# Altium PCB Inverter.PcbDoc
Units mm, origin at the board's own origin, x right, y up, seen from the top; angles counter-clockwise.
Board outline 99 x 99 mm, 2 copper layers (Top Layer, Bottom Layer); 78 components, 37 nets, 199 pads, 570 vias.
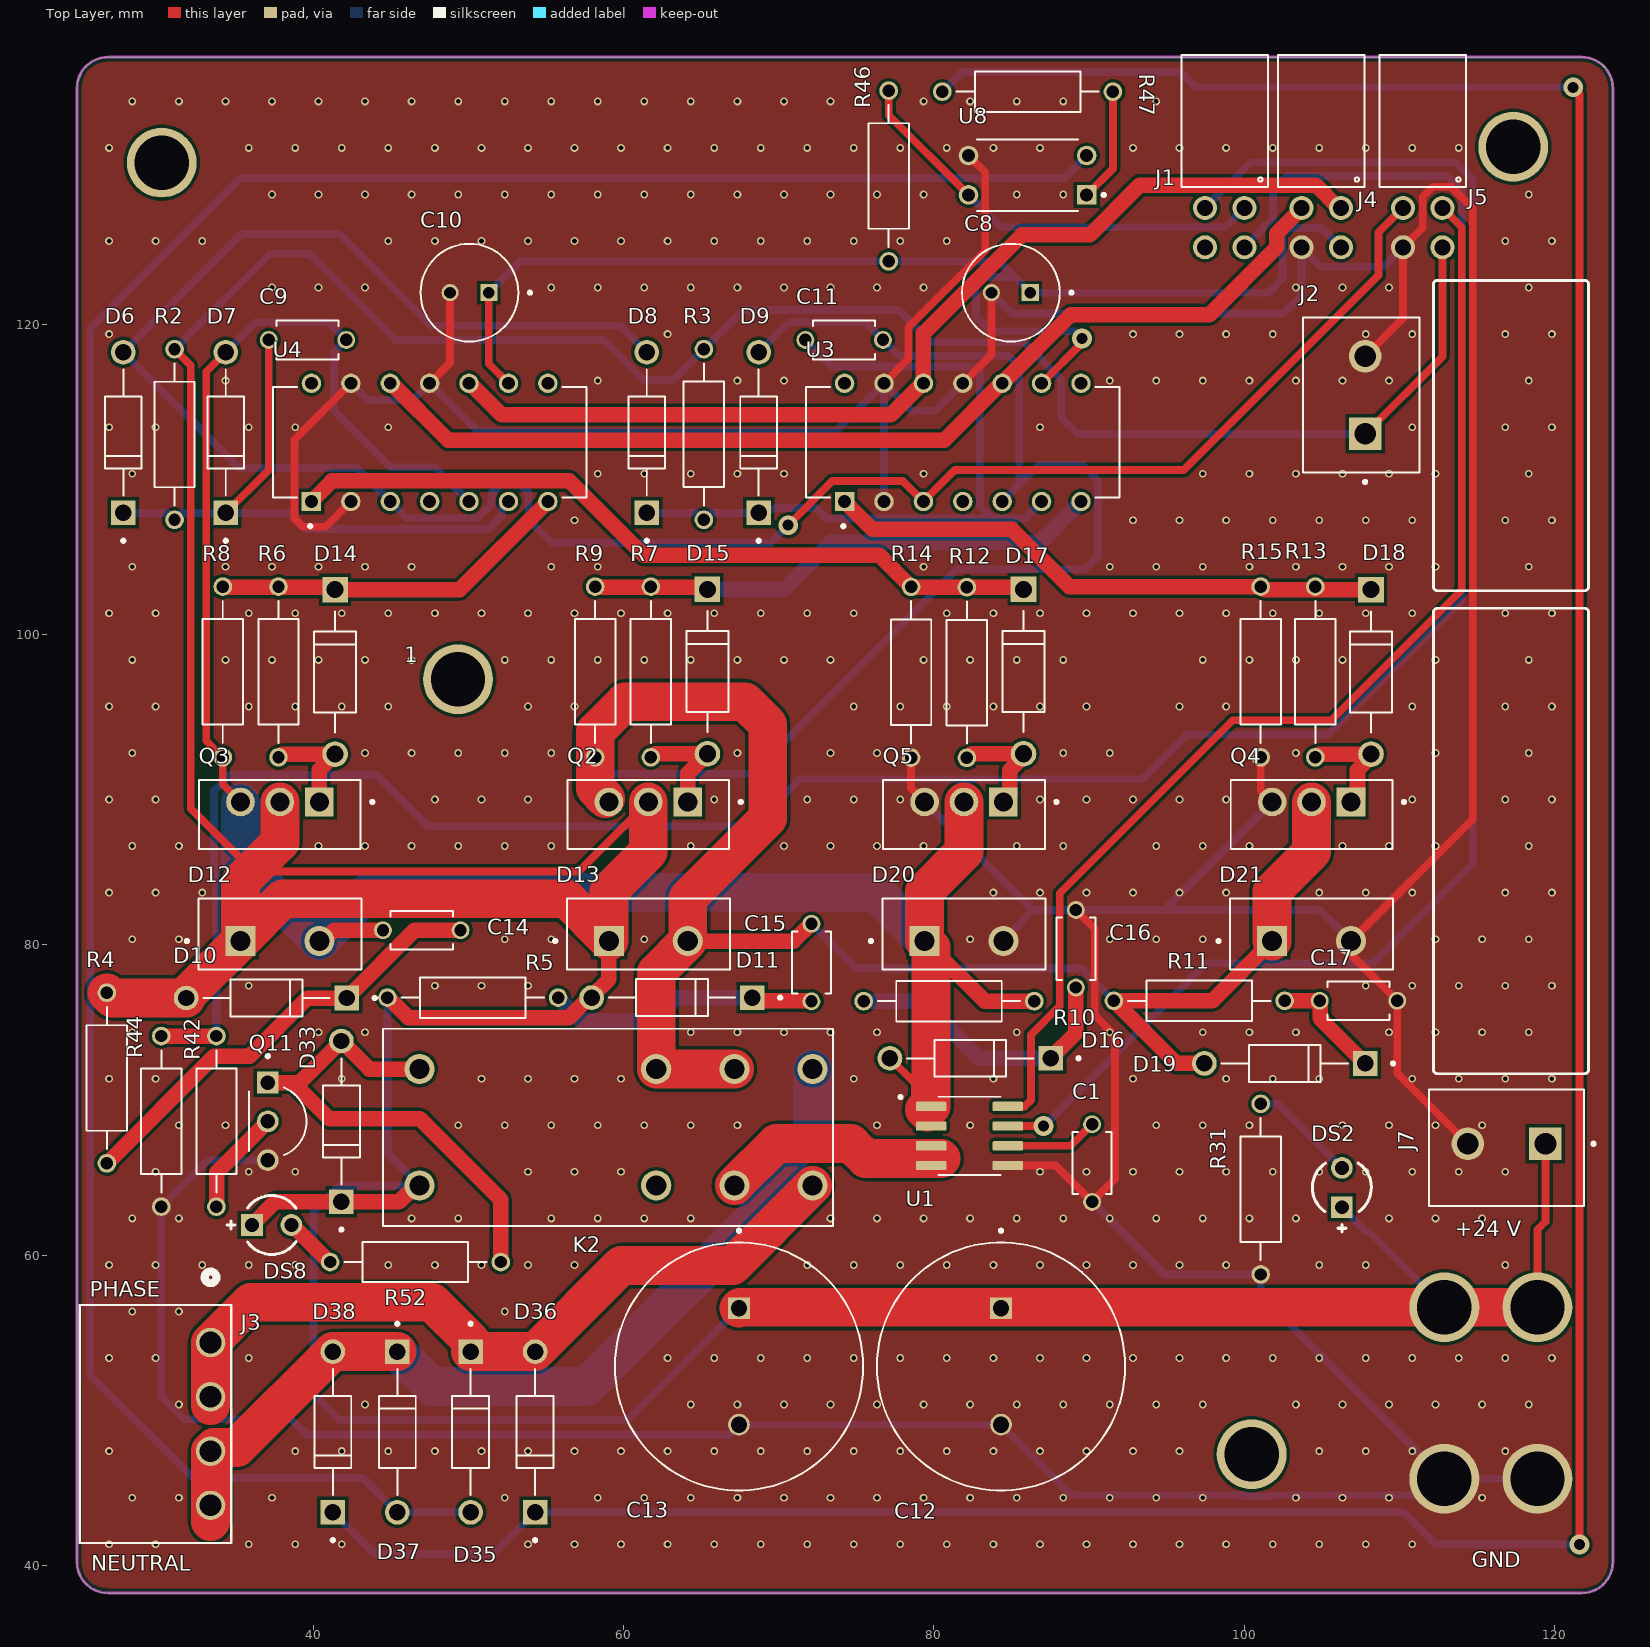
[diagram p0: Top Layer view]
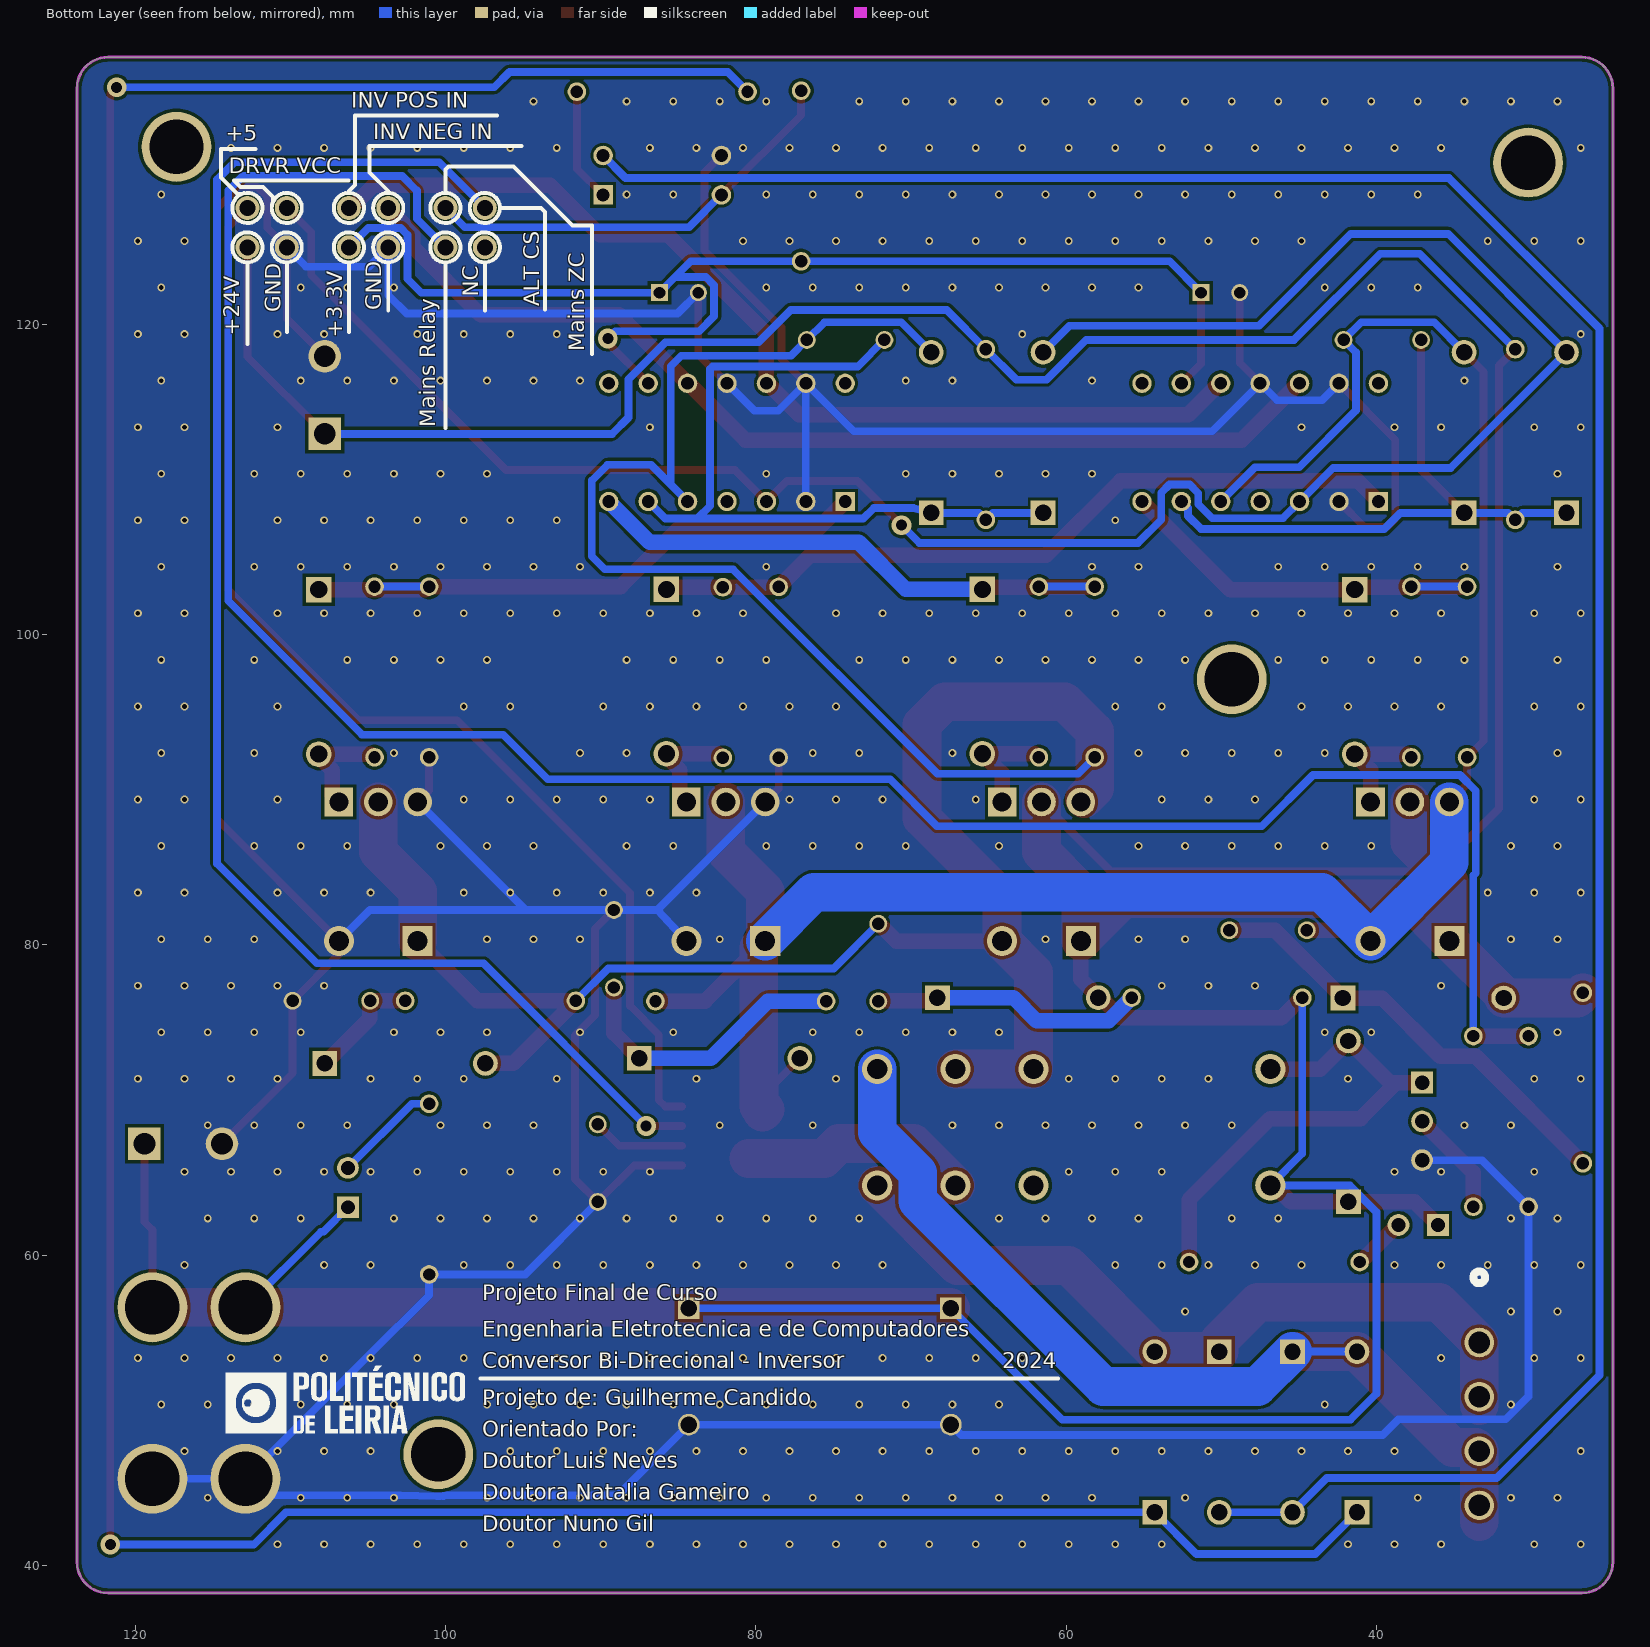
[diagram p1: Bottom Layer view, seen from below]
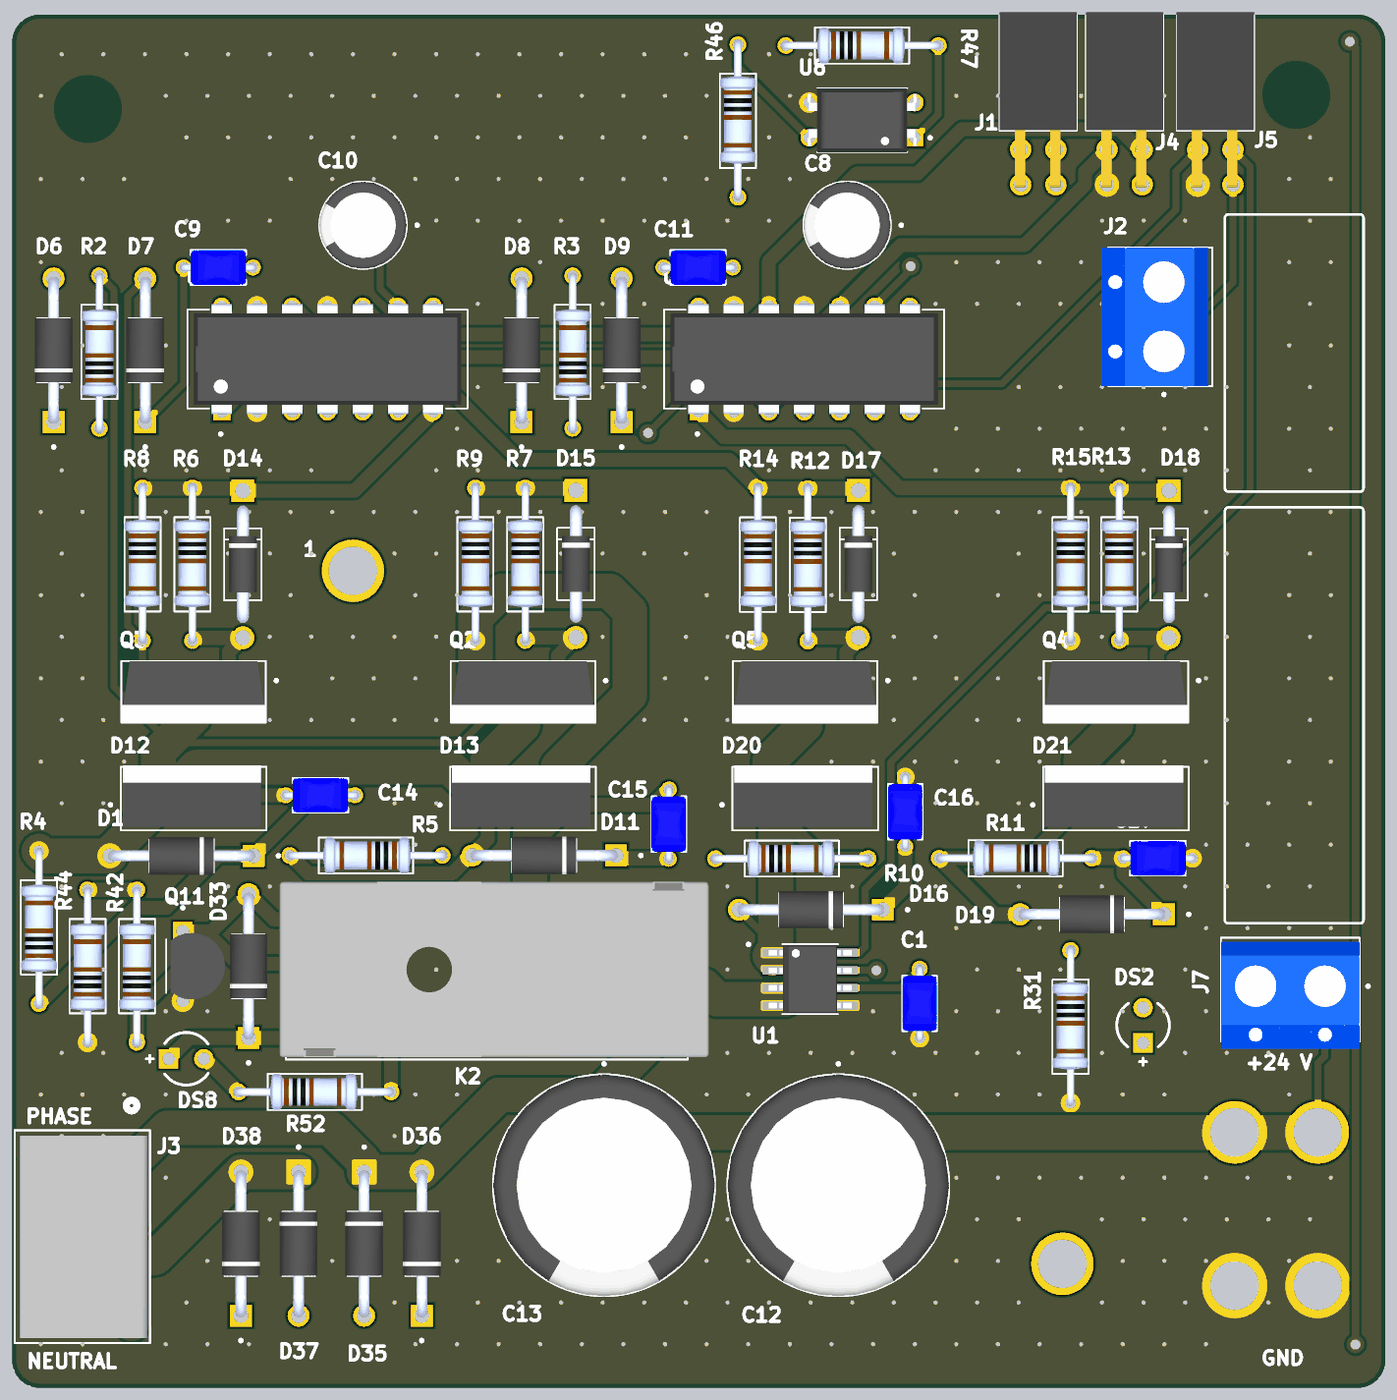
[diagram p2: 3D render of the assembled board from above, using the file's embedded part models]

## Layer stack, top to bottom
Top Solder: solder mask 0.0102, Solder Resist, Dk 3.5
Top Layer: signal copper 0.0356
Dielectric 1: dielectric 0.32, FR-4, Dk 4.8
Bottom Layer: signal copper 0.0356
Bottom Solder: solder mask 0.0102, Solder Resist, Dk 3.5

## Board outline
24.765,40.227 24.765,135.227 cw(c26.765,135.227) 26.765,137.227 121.765,137.227 cw(c121.765,135.227) 123.765,135.227 123.765,40.227 cw(c121.765,40.227) 121.765,38.227 26.765,38.227 cw(c26.765,40.227)

## Design rules (kind name [scope] priority, off if disabled: settings)
Clearance [All] p1: gap=0.2 ignorepadtopadclearanceinfootprint=TRUE
HoleSize [All] p1: absolutevalues=TRUE maxlimit=6.3 minlimit=0.3 maxpercent=80.000 minpercent=20.000
HoleToHoleClearance [All] p1: gap=0.5 allowstackedmicrovias=TRUE
PolygonConnect DirectPour [InNetClass('DirectPour')] p1: connectstyle=Direct reliefconductorwidth=0.254 reliefentries=4 polygonreliefangle="90 Angle" airgapwidth=0.254
PolygonConnect [All] p2: connectstyle=Relief reliefconductorwidth=0.254 reliefentries=4 polygonreliefangle="90 Angle" airgapwidth=0.254
RoutingVias [All] p1: holewidth=0.711 width=1.27 viastyle="Through Hole" minholewidth=0.3 minwidth=0.5 maxholewidth=6.3 maxwidth=10
SilkToSilkClearance [All] p1: silktosilkclearance=0
SolderMaskExpansion [All] p1: expansion=0.102 istentingtop=FALSE
UnRoutedNet [All] p1: checkbadconnections=TRUE
Width [All] p1: maxlimit=5 minlimit=0.127 preferedwidth=0.5 minimp=50.000000 maximp=50.000000 favimp=50.000000
26 further rules are at their usual default settings.

## Classes and differential pairs
net class DirectPour: +24 GND NetC9_1 NetC11_1 NetD35_1 NetD37_1
component class Zero-Cross_Detection: D35 D36 D37 D38 R46 R47 U8
component class "Power Circuit": D33 DS8 K2 Q11 R42 R44 R52
component class IR2110: C8 C9 C10 C11 D6 D7 D8 D9 R2 R3 U3 U4
component class Inverter: C1 C12 C13 C14 C15 C16 C17 D10 D11 D12 D13 D14 D15 D16 D17 D18 D19 D20 D21 Q2 Q3 Q4 Q5 R4 R5 R6 R7 R8 R9 R10 R11 R12 R13 R14 R15 U1

## Components (designator, comment, footprint, x,y, rotation, side; value= is the part's Value field where it differs from the comment)
1 "M3 Mounting Hole" "M3 - Mounting Hole"#1 49.327,97.13 r90 top
C1 "1nF" "Ceramic Capacitor" 90.195,65.938 r90 top
C8 "10uF Cap" CAP_10uF 84.963,122.047 r180 top
C9 "0.1uF" "Ceramic Capacitor" 39.624,118.999 r180 top
C10 "10uF Cap" CAP_10uF 50.063,122.047 r180 top
C11 "0.1uF" "Ceramic Capacitor" 74.219,118.999 r180 top
C12 "10uF Cap" 2200uF_Cap 84.328,52.832 r270 top
C13 "10uF Cap" 2200uF_Cap 67.437,52.832 r270 top
C14 "Ceramic Capacitor" "Ceramic Capacitor" 46.99,80.95 r0 top
C15 "Ceramic Capacitor" "Ceramic Capacitor" 72.111,78.867 r270 top
C16 "Ceramic Capacitor" "Ceramic Capacitor" 89.154,79.756 r270 top
C17 "Ceramic Capacitor" "Ceramic Capacitor" 107.366,76.403 r180 top
D6 "Fast-Rect Diode" "Common Trhough Hole" 27.752,113.03 r90 top
D7 "1N4110" "Common Trhough Hole" 34.356,113.03 r90 top
D8 "Fast-Rect Diode" "Common Trhough Hole" 61.493,113.03 r90 top
D9 "1N4110" "Common Trhough Hole" 68.707,113.03 r90 top
D10 "Normal Diode" "Common Trhough Hole" 36.984,76.581 r180 top
D11 "Normal Diode" "Common Trhough Hole" 63.119,76.606 r180 top
D12 "MBR10100" MBR10100 37.846,80.708 r0 top
D13 "MBR10100" MBR10100 61.595,80.708 r0 top
D14 "1N4148" "1N4007 DIODE" 41.402,97.599 r270 top
D15 "1N4148" "1N4007 DIODE" 65.405,97.624 r270 top
D16 "Normal Diode" "Common Trhough Hole" 82.347,72.695 r180 top
D17 "1N4148" "1N4007 DIODE" 85.776,97.624 r270 top
D18 "1N4148" "1N4007 DIODE" 108.179,97.599 r270 top
D19 "Normal Diode" "Common Trhough Hole" 102.616,72.365 r180 top
D20 "MBR10100" MBR10100 81.94,80.708 r0 top
D21 "MBR10100" MBR10100 104.343,80.708 r0 top
D33 "Normal Diode" "Common Trhough Hole" 41.808,68.631 r90 top
D35 "Normal Diode" "Common Trhough Hole" 50.14,48.609 r270 top
D36 "Normal Diode" "Common Trhough Hole" 54.297,48.609 r90 top
D37 "Normal Diode" "Common Trhough Hole" 45.415,48.609 r270 top
D38 "Normal Diode" "Common Trhough Hole" 41.258,48.609 r90 top
DS2 "LTL-1CHE" LED3mm 106.299,64.364 r90 top
DS8 "LTL-1CHE" LED3mm 37.313,61.951 r0 top
J1 "2x4-POS 2.54mm Header" "2x4-POS 2.54mm Header" 98.746,126.238 r180 top locked
J2 "KF301-2P" KF301-2P 107.798,115.443 r90 top
J3 "4P - Right 3.5mm Industrial Connector" "4P - Right 3.5mm Industrial Connector" 33.376,54.376 r270 top
J4 "2x4-POS 2.54mm Header" "2x4-POS 2.54mm Header" 104.97,126.238 r180 top locked
J5 "2x4-POS 2.54mm Header" "2x4-POS 2.54mm Header" 111.51,126.238 r180 top locked
J7 "KF301-2P" KF301-2P 116.916,67.183 r180 top
K2 "relay 8pin" "Relay socket 8pin" 59.512,68.25 r0 top
Q2 "IRF530NPBF" IRF530N 61.595,88.407 r180 top
Q3 "IRF530NPBF" IRF530N 37.846,88.407 r180 top
Q4 "IRF530NPBF" IRF530N 104.343,88.407 r180 top
Q5 "IRF530NPBF" IRF530N 81.94,88.407 r180 top
Q11 "BC548" bc548 37.719,68.631 r270 top
R2 "Resistor" "Resistor_Through Hole" 31.054,112.903 r90 top
R3 "Resistor" "Resistor_Through Hole" 65.176,112.905 r90 top
R4 "Resistor" "Resistor_Through Hole" 26.695,71.425 r90 top
R5 "Resistor" "Resistor_Through Hole" 50.278,76.606 r180 top
R6 "15R" "Resistor_Through Hole" 37.757,97.599 r270 top
R7 "15R" "Resistor_Through Hole" 61.76,97.599 r270 top
R8 "10K" "Resistor_Through Hole" 34.163,97.599 r270 top
R9 "10K" "Resistor_Through Hole" 58.166,97.599 r270 top
R10 "Resistor" "Resistor_Through Hole" 80.975,76.378 r0 top
R11 "Resistor" "Resistor_Through Hole" 97.104,76.403 r180 top
R12 "15R" "Resistor_Through Hole" 82.128,97.561 r270 top
R13 "15R" "Resistor_Through Hole" 104.584,97.599 r270 top
R14 "10K" "Resistor_Through Hole" 78.531,97.58 r270 top
R15 "10K" "Resistor_Through Hole" 101.067,97.599 r270 top
R31 "Resistor_Through Hole" "Resistor_Through Hole" 101.067,64.262 r270 top
R42 "Resistor_Through Hole" "Resistor_Through Hole" 33.757,68.631 r90 top
R44 "Resistor_Through Hole" "Resistor_Through Hole" 30.201,68.631 r90 top
R46 "Resistor" "Resistor_Through Hole" 77.089,129.565 r270 top
R47 "Resistor" "Resistor_Through Hole" 86.041,135.001 r0 top
R52 "Resistor_Through Hole" "Resistor_Through Hole" 46.584,59.563 r0 top
U1 "ACS712" ACS712 82.296,67.691 r0 top
U3 "IR2110" IR2110 81.864,112.395 r90 top
U4 "IR2110" IR2110 47.498,112.395 r90 top
U8 "PC817" PC817 86.041,129.616 r180 top
? "M3 Mounting Hole" "M3 - Mounting Hole"#2 163.195,5.207 r0 top
? "M3 Mounting Hole" "M3 - Mounting Hole"#3 114.808,58.547 r0 top
? "M3 Mounting Hole" "M3 - Mounting Hole"#4 114.681,49.276 r0 top
? "M3 Mounting Hole" "M3 - Mounting Hole"#5 205.364,85.446 r0 top
? "M3 Mounting Hole" "M3 - Mounting Hole"#6 108.839,58.547 r0 top
? "M3 Mounting Hole" "M3 - Mounting Hole"#7 108.712,49.276 r0 top
? "M3 Mounting Hole" "M3 - Mounting Hole"#1 100.482,47.168 r0 top

## Footprints (in the part's own frame and the unit in brackets; to place one, negate y for a bottom-side part, rotate by r counter-clockwise, add the part's x,y. Pads: shape width x height; smd on the part's side, far side on the other; paste and mask are expansions set on the pad)
"1N4007 DIODE" [mm]
  round 1.65 hole 1.1: A(5.3,0)
  rect 1.65x1.65 / inner round 1.65 / far side rect 1.65x1.65 hole 1.1: C(-5.3,0)
  silkscreen extent -3.9,-1.35 3.9,1.35, body extent -4.24,-1 4.24,1, height 2
"2x4-POS 2.54mm Header" [mm]
  round 1.545 hole 1.03: 1(-1.27,-1.27) 2(-1.27,1.27) 3(1.27,-1.27) 4(1.27,1.27)
  silkscreen extent -2.79,-11.13 2.79,-2.63, body extent -2.79,-11.15 2.79,1.45, height 5.02
"4P - Right 3.5mm Industrial Connector" [mil]
  round 75 / inner round 60 / far side round 75 hole 55 paste-99999 mask+0: 1(0,0) 2(137.79,0) 3(275.59,0) 4(413.39,0)
  silkscreen extent -180,-332 509,52, body extent -80,-317 494,45, height 274
2200uF_Cap [mm]
  round 1.4 hole 1.05: N(3.75,0)
  rect 1.4x1.4 hole 1.05: P(-3.75,0)
  silkscreen extent -8.85,-8 8,8, body extent -8,-8 8,8, height 31.5
ACS712 [mm]
  rrect25% 1.97x0.6 smd: 1(-2.475,1.905) 2(-2.475,0.635) 3(-2.475,-0.635) 4(-2.475,-1.905) 5(2.475,-1.905) 6(2.475,-0.635) 7(2.475,0.635) 8(2.475,1.905)
  silkscreen extent -4.54,-2.53 2,2.6, body extent -3,-2.45 3,2.45, height 1.75
bc548 [mm]
  rect 1.4x1.4 hole 0.93: 1(-2.5,-0.655)
  round 1.4 hole 0.93: 2(0,-0.655) 3(2.5,-0.655)
  silkscreen extent -4.3,-1.85 2.18,1.85, body extent -2.4,-1.53 2.4,2.4, height 7.74
CAP_10uF [mm]
  round 1.1 hole 0.75: N(1.25,0)
  rect 1.1x1.1 hole 0.75: P(-1.25,0)
  silkscreen extent -4,-3.15 3.15,3.15, body extent -3.15,-3.15 3.15,3.15, height 11.2
"Ceramic Capacitor" [mm] "22pF"
  round 1.15 hole 0.8: 1(-2.5,0) 2(2.5,0)
  silkscreen extent -2,-1.25 2,1.25, body extent -2.75,-1.25 2.75,1.25, height 5.5
"Common Trhough Hole" [mm]
  rect 1.59x1.59 / inner round 1.59 / far side rect 1.59x1.59 hole 1.06: 1(-5.18,0)
  round 1.59 hole 1.06: 2(5.18,0)
  silkscreen extent -7.07,-1.19 4.07,1.19, body extent -5.29,-1.36 5.29,1.36, height 2.72
IR2110 [mm]
  rect 1.25x1.25 / inner round 1.25 / far side rect 1.25x1.25 hole 0.83: 1(-3.81,7.62)
  round 1.25 hole 0.83: 2(-3.81,5.08) 3(-3.81,2.54) 4(-3.81,0) 5(-3.81,-2.54) 6(-3.81,-5.08) 7(-3.81,-7.62) 8(3.81,-7.62) 9(3.81,-5.08) 10(3.81,-2.54) 11(3.81,0) 12(3.81,2.54) 13(3.81,5.08) 14(3.81,7.62)
  silkscreen extent -5.5,-10.1 3.56,10.1, body extent -3.96,-9.65 3.96,9.65, height 5.33
IRF530N [mm]
  rect 1.845x1.845 hole 1.23: 1(-2.54,-0.81)
  round 1.845 hole 1.23: 2(0,-0.81) 3(2.54,-0.81)
  silkscreen extent -6.06,-2.22 5.21,2.22, body extent -5.21,-2.22 5.21,2.22, height 19.3
KF301-2P [mm]
  rect 2.1x2.1 hole 1.4: 1(-2.5,0)
  round 2.1 hole 1.4: 2(2.5,0)
  silkscreen extent -5.7,-3.5 5,4, body extent -5,-3.2 5,4.5, height 10
LED3mm [mm] "THD, 2-Leads, Dia 3.8mm, Pitch 2.54mm"
  rect 1.4x1.4 hole 0.9: 1(-1.27,0)
  round 1.4 hole 0.9: 2(1.27,0)
  silkscreen extent -2.87,-1.9 1.58,1.9, body extent -1.9,-1.9 1.9,1.9, height 6.5
"M3 - Mounting Hole"#1 [mm]
  round 4.5 / inner round 1.524 / far side round 4.5 hole 3.5: 1(0,0)
"M3 - Mounting Hole"#2 [mm]
  round 4.5 / inner round 1.524 / far side round 4.5 hole 3.5: 1(-45.847,126.238)
"M3 - Mounting Hole"#3 [mm]
  round 4.5 / inner round 1.524 / far side round 4.5 hole 3.5: 1(4.095,-1.905)
"M3 - Mounting Hole"#4 [mm]
  round 4.5 / inner round 1.524 / far side round 4.5 hole 3.5: 1(4.222,-3.683)
"M3 - Mounting Hole"#5 [mm]
  round 4.5 / inner round 1.524 / far side round 4.5 hole 3.5: 1(-175.138,44.983)
"M3 - Mounting Hole"#6 [mm]
  round 4.5 / inner round 1.524 / far side round 4.5 hole 3.5: 1(4.064,-1.905)
"M3 - Mounting Hole"#7 [mm]
  round 4.5 / inner round 1.524 / far side round 4.5 hole 3.5: 1(4.191,-3.683)
MBR10100 [mm]
  rect 1.94x1.94 / inner round 1.94 / far side rect 1.94x1.94 hole 1.29: 1(-2.54,-0.453)
  round 1.94 hole 1.29: 3(2.54,-0.453)
  silkscreen extent -6.1,-2.29 5.25,2.29, body extent -5.11,-2.03 4.86,2.41, height 19.05
PC817 [mm]
  rect 1.26x1.26 / inner round 1.26 / far side rect 1.26x1.26 hole 0.84: 1(-3.81,1.27)
  round 1.26 hole 0.84: 2(-3.81,-1.27) 3(3.81,-1.27) 4(3.81,1.27)
  silkscreen extent -5.01,-2.3 3.25,2.3, body extent -3.94,-2.3 3.94,2.3, height 4.55
"Relay socket 8pin" [mm]
  round 1.95 hole 1.3: 11(7.63,-3.75) 12(2.59,-3.75) 14(12.67,-3.75) 21(7.63,3.75) 22(2.59,3.75) 24(12.67,3.75) A1(-12.67,-3.75) A2(-12.67,3.75)
  silkscreen extent -15.02,-6.35 13.98,6.35, body extent -15.48,-6.2 15.48,6.45, height 8.9
"Resistor_Through Hole" [mm]
  round 1.2 hole 0.8: 1(-5.5,0) 2(5.5,0)
  silkscreen extent -4.58,-1.3 4.58,1.3, body extent -5.84,-1.29 5.71,1.29, height 2.6

## Part data
C1 C9 C11: library part "Ceramic Capacitor", Package="0805 AVX", Availability="In Stock", Check_prices=https://www.snapeda.com/parts/LD051A121KAB2A/AVX/view-part/?ref=eda, MF=AVX, MP=LD051A121KAB2A, Price=None, Purchase-URL=https://pricing.snapeda.com/search/part/LD051A121KAB2A/?ref=eda, SnapEDA_Link=https://www.snapeda.com/parts/LD051A121KAB2A/AVX/view-part/?ref=snap
C8 C10 C12 C13: "CAP ALUM 10UF 20% 50V RADIAL", Package="RADIAL-2 Panasonic", Availability="In Stock", Check_prices=https://www.snapeda.com/parts/ECE-A1HN100UI/Panasonic/view-part/2321690/?ref=eda, MF=Panasonic, MP=ECE-A1HN100UI, Price=None, SnapEDA_Link=https://www.snapeda.com/parts/ECE-A1HN100UI/Panasonic/view-part/2321690/?ref=snap
C14 C15 C16 C17: Package="0805 AVX", Availability="In Stock", Check_prices=https://www.snapeda.com/parts/LD051A121KAB2A/AVX/view-part/?ref=eda, MF=AVX, MP=LD051A121KAB2A, Price=None, Purchase-URL=https://pricing.snapeda.com/search/part/LD051A121KAB2A/?ref=eda, SnapEDA_Link=https://www.snapeda.com/parts/LD051A121KAB2A/AVX/view-part/?ref=snap
D6 D8: library part "Normal Diode", Package="DO-41 NTE Electronics", Availability="In Stock", Check_prices=https://www.snapeda.com/parts/1N4007/NTE+Electronics/view-part/?ref=eda, MF="NTE Electronics, Inc.", MP=1N4007, Price=None, Purchase-URL=https://pricing.snapeda.com/search/part/1N4007/?ref=eda, SnapEDA_Link=https://www.snapeda.com/parts/1N4007/NTE+Electronics/view-part/?ref=snap
D7 D9: library part "Zener Diode", Package="SMA-2 Taiwan Semiconductor", Availability="In Stock", Check_prices=https://www.snapeda.com/parts/1SMA5926/Taiwan+Semiconductor/view-part/?ref=eda, MF="Taiwan Semiconductor", MP=1SMA5926, Price=None, Purchase-URL=https://pricing.snapeda.com/search/part/1SMA5926/?ref=eda, SnapEDA_Link=https://www.snapeda.com/parts/1SMA5926/Taiwan+Semiconductor/view-part/?ref=snap
D10 D11 D16 D19 D33 D35 D36 D37 D38: Package="DO-41 NTE Electronics", Availability="In Stock", Check_prices=https://www.snapeda.com/parts/1N4007/NTE+Electronics/view-part/?ref=eda, MF="NTE Electronics, Inc.", MP=1N4007, Price=None, Purchase-URL=https://pricing.snapeda.com/search/part/1N4007/?ref=eda, SnapEDA_Link=https://www.snapeda.com/parts/1N4007/NTE+Electronics/view-part/?ref=snap
D12 D13 D20 D21: Package="DO-41 Diodes Inc.", Availability="In Stock", Check_prices=https://www.snapeda.com/parts/1N5817-T/Diodes+Inc./view-part/?ref=eda, MF="Diodes Inc.", MP=1N5817-T, Price=None, Purchase-URL=https://pricing.snapeda.com/search/part/1N5817-T/?ref=eda, SnapEDA_Link=https://www.snapeda.com/parts/1N5817-T/Diodes+Inc./view-part/?ref=snap
D14 D15 D17 D18: library part 1N4007, "Diode Standard 1000 V 1A Through Hole DO-41", Package="DO-41 NTE Electronics", Availability="In Stock", Check_prices=https://www.snapeda.com/parts/1N4007/NTE+Electronics/view-part/?ref=eda, MF="NTE Electronics, Inc.", MP=1N4007, Price=None, Purchase-URL=https://pricing.snapeda.com/search/part/1N4007/?ref=eda, SnapEDA_Link=https://www.snapeda.com/parts/1N4007/NTE+Electronics/view-part/?ref=snap
DS2 DS8: library part "RED_LED 3mm", "Radial LED, 12.6 mcd, 20 mA, 2 V, -55 to 100 degC, 2-Pin THD, RoHS, Bulk", Case\Package=Radial, Current Rating="3.6 A", Max Operating Temperature="130 degC", Min Operating Temperature="-40 degC", Package Quantity=55, Resistance="0.045 Ohm", Tolerance=20%, ComponentLink1Description="Manufacturer URL", ComponentLink1URL=http://www.us.liteon.com/, ComponentLink2Description=Datasheet, ComponentLink2URL=https://datasheet.ciiva.com/15117/getdatasheetpartid-187746-15117985.pdf, DatasheetVersion=Dec-03, Height="1.1 inch", Lead Pitch="11.44 mm", Length="0.97 inch", Mount="Through Hole", PackageDescription="2-Pin Through Hole Device, Dia 3.8 mm, Pitch 2.54 mm", PackageReference=LTL-1CHE, Packaging=Tray, Radiation Hardening=No, RoHSCompliant=true, Shielding=Unshielded, Width="0.62 inch"
J1 J4 J5: "Female header [WÃ¼rth Elektronik] 613004243121 Female header", Package=None, Availability=Unavailable, Check_prices=https://www.snapeda.com/parts/613004243121/W%C3%BCrth%20Elektronik/view-part/1737074/?ref=eda, MF="WÃ¼rth Elektronik", MP=613004243121, Price=None, SnapEDA_Link=https://www.snapeda.com/parts/613004243121/W%C3%BCrth%20Elektronik/view-part/1737074/?ref=snap
J2 J7: "2 Pin Terminal Block 5mm Pitch", Package=None, Availability=Unavailable, MP=KF301-2P, Price=None
J3: Package=None, Availability=Unavailable, MP=5-146290-4, Price=None
K2: "General Purpose Relay DPDT _2 Form C_ 24VDC Coil Through Hole", Package=None, Availability=Unavailable, MF="TE Connectivity", MP=1-1393243-0, Price=None, SnapEDA_Link=https://www.snapeda.com/parts/1-1393243-0/TE%20Connectivity%20Potter%20&%20Brumfield%20Relays/view-part/244556/?ref=snap
Q2 Q3 Q4 Q5: "RoHS Compliant", Package="TO-220 Infineon", Availability="In Stock", Check_prices=https://www.snapeda.com/parts/IRF530NPBF/Infineon+Technologies/view-part/?ref=eda, MF="Infineon Technologies", MP=IRF530NPBF, Price=None, Purchase-URL=https://pricing.snapeda.com/search/part/IRF530NPBF/?ref=eda, SnapEDA_Link=https://www.snapeda.com/parts/IRF530NPBF/Infineon+Technologies/view-part/?ref=snap
Q11: "Bipolar (BJT) Transistor NPN 30V 100mA 300MHz 500mW Through Hole TO-92-3", Package="TO-92 ON Semiconductor", Availability=Warning, DigiKey-Purchase-URL=https://snapeda.com/shop?store=DigiKey&id=2007035, MF="ON Semiconductor", MP=BC548, Price=None, SnapEDA_Link=https://www.snapeda.com/parts/BC548/ON%20Semiconductor/view-part/2007035/?ref=snap
R2 R3 R4 R5 R10 R11 R46 R47: Package=0805, Power_Rating=".25 W", Resistance=.33, Tolerance=1%, Availability="In Stock", Check_prices=https://www.snapeda.com/parts/2-2176053-0/TE+Connectivity/view-part/?ref=eda, EU_RoHS_Compliance="Compliant with Exemptions", MF="TE Connectivity", MP=2-2176053-0, Price=None, SnapEDA_Link=https://www.snapeda.com/parts/2-2176053-0/TE+Connectivity/view-part/?ref=snap
R6 R7 R12 R13: library part "Resistor_Through Hole", "1.02 Ohms Â±1% 0.25W, 1/4W Through Hole Resistor Axial Metal Film", Package="Axial Yageo", Availability=Warning, Check_prices=https://www.snapeda.com/parts/MFR-25FTE52-1R/Yageo/view-part/4629919/?ref=eda, MF=Yageo, MP=MFR-25FTE52-1R, Price=None, Purchase-URL=https://pricing.snapeda.com/search/part/MFR-25FTE52-1R/?ref=eda, SnapEDA_Link=https://www.snapeda.com/parts/MFR-25FTE52-1R/Yageo/view-part/4629919/?ref=snap
R8 R9 R14 R15: library part Resistor, Package=0805, Power_Rating=".25 W", Resistance=.33, Tolerance=1%, Availability="In Stock", Check_prices=https://www.snapeda.com/parts/2-2176053-0/TE+Connectivity/view-part/?ref=eda, EU_RoHS_Compliance="Compliant with Exemptions", MF="TE Connectivity", MP=2-2176053-0, Price=None, SnapEDA_Link=https://www.snapeda.com/parts/2-2176053-0/TE+Connectivity/view-part/?ref=snap
R31 R42 R44 R52: "1.02 Ohms Â±1% 0.25W, 1/4W Through Hole Resistor Axial Metal Film", Package="Axial Yageo", Availability=Warning, Check_prices=https://www.snapeda.com/parts/MFR-25FTE52-1R/Yageo/view-part/4629919/?ref=eda, MF=Yageo, MP=MFR-25FTE52-1R, Price=None, Purchase-URL=https://pricing.snapeda.com/search/part/MFR-25FTE52-1R/?ref=eda, SnapEDA_Link=https://www.snapeda.com/parts/MFR-25FTE52-1R/Yageo/view-part/4629919/?ref=snap
U1: "Current Sensor 5A 1 Channel Hall Effect, Open Loop Bidirectional 8-SOIC (0.154, 3.90mm Width)", Package="SOIC-8 Allegro MicroSystems LLC", Availability="In Stock", Check_prices=https://www.snapeda.com/parts/ACS712ELCTR-05B-T/Allegro+MicroSystems+LLC/view-part/?ref=eda, MF="Allegro MicroSystems LLC", MP=ACS712ELCTR-05B-T, Price=None, Purchase-URL=https://pricing.snapeda.com/search/part/ACS712ELCTR-05B-T/?ref=eda, SnapEDA_Link=https://www.snapeda.com/parts/ACS712ELCTR-05B-T/Allegro+MicroSystems+LLC/view-part/?ref=snap
U3 U4: "Half-Bridge Gate Driver IC Non-Inverting 16-SOIC", Package="SOIC-16 International Rectifier", Availability="In Stock", Check_prices=https://www.snapeda.com/parts/IR2110/Infineon+Technologies/view-part/?ref=eda, MF=Infineon, MP=IR2110, Price=None, Purchase-URL=https://pricing.snapeda.com/search/part/IR2110/?ref=eda, SnapEDA_Link=https://www.snapeda.com/parts/IR2110/Infineon+Technologies/view-part/?ref=snap
U8: "Optoisolator Transistor Output - 1 Channel 4-DIP", Package="DIP-4 Sharp Microelectronics", Availability="In Stock", Check_prices=https://www.snapeda.com/parts/PC817X3NSZ1B/Sharp+Microelectronics/view-part/?ref=eda, MF="Sharp Microelectronics", MP=PC817X3NSZ1B, Price=None, Purchase-URL=https://pricing.snapeda.com/search/part/PC817X3NSZ1B/?ref=eda, SnapEDA_Link=https://www.snapeda.com/parts/PC817X3NSZ1B/Sharp+Microelectronics/view-part/?ref=snap

## Via types
v1: diameter 0.5, hole 0.3, Top Layer to Bottom Layer, tented both sides, 565 vias
v2: diameter 1.27, hole 0.711, Top Layer to Bottom Layer, tented both sides, 5 vias

## Nets (pads, with @x,y where several pads share a name; then routed paths per layer and width w, separated by ;. In a path a pad name is that pad's centre, name@x,y a point inside that pad or via, vN(x,y) a via of type N, cw(c..) or ccw(c..) an arc to the next point about the centre after c; other vN are vias at no path point)
+3.3: C8.P C10.P J4.2 R46.2 U3.9 U4.9 | length 83
  Top Layer w0.5: C10.P 51.313,117.47 U4.9 ; U3.9 89.544,118.805 v2(89.544,119.09)
  Bottom Layer w0.5: C10.P 53.332,124.065 R46.2 84.195,124.065 85.197,123.063 ; v2(89.544,119.09) 89.074,119.561 83.665,119.561 82.702,120.523 82.702,122.53 83.236,123.063 85.197,123.063 ; J4.2 104.995,126.213 102.895,126.213 102.464,125.781 102.464,122.936 101.575,122.047 C8.P 85.197,123.063
+5: J5.1 U1.8 | length 74.9
  Top Layer w0.5: U1.8 85.852,69.596 86.258,70.002 86.258,74.219 88.113,76.073 88.113,83.337 99.263,94.488 105.613,94.488 114.021,102.895 114.021,126.267 J5.1
+24: ?.1@112.903,56.642 ?.1@118.903,56.642 C12.P C13.P D10.2 D11.2 D12.1 D13.1 D33.1 DS2.1 DS8.1 J2.1 J5.2 J7.1 K2.A1 Q2.2 Q3.2 R2.2 R3.2 R4.2 R5.2 | length 404.8
  Top Layer w0.5: R2.2 32.106,117.351 32.106,88.798 36.17,84.734 57.112,84.734 Q2.2 ; J2.1 112.78,117.925 J5.2 ; ?.1@118.903,56.642 118.903,61.646 119.416,62.159 J7.1
  Top Layer w1: DS8.1 37.543,63.451 D33.1 45.536,63.451 46.585,64.5 K2.A1 ; R5.2 44.833,76.606 46.133,75.306 56.479,75.306 57.779,76.606 D11.2 57.939,76.669 59.055,77.785 D13.1
  Top Layer w2.5: R4.2 27.039,76.581 D10.2 31.804,76.753 D12.1 ; Q3.2 37.846,86.613 35.306,84.073 D12.1 ; Q2.2 61.595,86.006 59.055,83.466 D13.1 56.335,82.975 38.026,82.975 D12.1 ; C13.P 67.497,56.642 112.903,56.642 ?.1@118.903,56.642
  Bottom Layer w0.5: R2.2 37.213,124.562 39.753,124.562 45.315,118.999 58.709,118.999 61.275,116.434 63.205,116.434 R3.2 67.701,120.929 77.749,120.929 79.832,118.847 85.827,118.847 88.214,116.459 88.214,113.995 89.266,112.943 J2.1 ; R5.2 44.778,66.564 K2.A1 41.716,64.5 40.005,62.789 40.005,51.079 41.681,49.403 60.258,49.403 C13.P C12.P ; DS2.1 107.874,61.519 108.026,61.519 ?.1@112.903,56.642
GND: ?.1@112.903,45.593 ?.1@118.903,45.593 C1.1 C8.N C10.N C12.N C13.N C16.1 C17.1 D20.3 D21.3 J2.2 J4.4 J5.4 J7.2 Q4.3 Q5.3 Q11.3 R14.2 R15.2 R31.2 R44.1 U1.5 U3.2 U3.11 U3.13 U4.2 U4.11 U4.13 U8.3 | length 432.5
  Top Layer w0.5: U4.2 40.792,106.959 39.319,106.959 38.786,107.493 38.786,112.573 U4.13 ; U4.11 48.813,117.52 C10.N ; U3.13 78.359,117.78 78.359,119.804 83.312,124.757 83.312,129.806 U8.3 ; R14.2 78.531,90.087 Q5.3 ; U3.11 83.713,118.054 C8.N ; U1.5 87.848,65.786 C1.1 91.669,64.912 91.669,74.168 90.373,75.463 90.373,81.037 C16.1 ; R15.2 101.067,89.954 Q4.3 ; J2.2 110.24,120.385 J5.4 111.506,126.234 111.506,128.219 112.166,128.88 113.335,128.88 114.732,127.483 114.732,88.104 D21.3 106.883,79.386 C17.1 109.866,71.733 J7.2
  Bottom Layer w0.5: Q11.3 33.201,66.131 R44.1 30.201,50.902 31.674,49.428 38.583,49.428 39.599,48.412 66.767,48.412 C13.N C12.N 88.737,44.673 88.884,44.526 99.924,44.526 ccw(c100.482,47.168) 100.557,44.469 102.922,44.526 111.836,44.526 ?.1@112.903,45.593 ; U4.13 43.51,115.113 46.406,115.113 U4.11 50.597,113.106 73.685,113.106 U3.13 ; U3.2 U3.13 ; Q5.3 86.361,82.256 ; U3.11 80.089,114.43 78.559,114.43 U3.13 ; C8.N 85.059,120.701 102.514,120.701 103.7,121.886 J4.4 104.945,123.723 108.995,123.723 J5.4 ; D20.3 86.361,82.256 ; C1.1 94.872,58.762 R31.2 101.067,57.429 104.978,53.518 110.978,47.518 ?.1@112.903,45.593 ; Q4.3 94.842,82.256 ; D21.3 104.882,82.256 94.842,82.256 ; ?.1@118.903,45.593 ?.1@112.903,45.593 ; 86.361,82.256 C16.1 94.842,82.256
  other v1: 26.836,41.376 29.836,41.376 35.836,41.376 38.836,41.376 41.836,41.376 53.836,41.376 56.836,41.376 59.836,41.376 62.836,41.376 65.836,41.376 68.836,41.376 71.836,41.376 74.836,41.376 77.836,41.376 80.836,41.376 83.836,41.376 86.836,41.376 89.836,41.376 92.836,41.376 95.836,41.376 98.836,41.376 101.836,41.376 104.836,41.376 107.836,41.376 110.836,41.376 28.336,44.376 31.336,44.376 37.336,44.376 52.336,44.376 58.336,44.376 61.336,44.376 64.336,44.376 67.336,44.376 70.336,44.376 73.336,44.376 76.336,44.376 79.336,44.376 82.336,44.376 85.336,44.376 88.336,44.376 91.336,44.376 94.336,44.376 97.336,44.376 103.336,44.376 106.336,44.376 109.336,44.376 115.336,44.376 26.836,47.376 38.836,47.376 41.836,47.376 44.836,47.376 47.836,47.376 50.836,47.376 53.836,47.376 56.836,47.376 59.836,47.376 62.836,47.376 65.836,47.376 68.836,47.376 71.836,47.376 74.836,47.376 77.836,47.376 80.836,47.376 83.836,47.376 86.836,47.376 89.836,47.376 92.836,47.376 95.836,47.376 104.836,47.376 107.836,47.376 110.836,47.376 116.836,47.376 31.336,50.376 43.336,50.376 64.336,50.376 67.336,50.376 70.336,50.376 73.336,50.376 76.336,50.376 79.336,50.376 82.336,50.376 85.336,50.376 88.336,50.376 91.336,50.376 94.336,50.376 97.336,50.376 103.336,50.376 106.336,50.376 109.336,50.376 112.336,50.376 115.336,50.376 118.336,50.376 26.836,53.376 29.836,53.376 35.836,53.376 62.836,53.376 65.836,53.376 68.836,53.376 71.836,53.376 74.836,53.376 77.836,53.376 80.836,53.376 83.836,53.376 86.836,53.376 89.836,53.376 92.836,53.376 95.836,53.376 98.836,53.376 101.836,53.376 104.836,53.376 107.836,53.376 110.836,53.376 113.836,53.376 116.836,53.376 119.836,53.376 28.336,56.376 31.336,56.376 52.336,56.376 26.836,59.376 29.836,59.376 32.836,59.376 35.836,59.376 38.836,59.376 44.836,59.376 47.836,59.376 50.836,59.376 53.836,59.376 56.836,59.376 71.836,59.376 74.836,59.376 77.836,59.376 80.836,59.376 83.836,59.376 86.836,59.376 89.836,59.376 92.836,59.376 95.836,59.376 98.836,59.376 104.836,59.376 107.836,59.376 116.836,59.376 28.336,62.376 31.336,62.376 46.336,62.376 49.336,62.376 55.336,62.376 58.336,62.376 61.336,62.376 64.336,62.376 73.336,62.376 76.336,62.376 79.336,62.376 82.336,62.376 85.336,62.376 88.336,62.376 91.336,62.376 94.336,62.376 97.336,62.376 100.336,62.376 103.336,62.376 109.336,62.376 112.336,62.376 115.336,62.376 29.836,65.376 35.836,65.376 38.836,65.376 53.836,65.376 56.836,65.376 59.836,65.376 86.836,65.376 89.836,65.376 92.836,65.376 95.836,65.376 98.836,65.376 101.836,65.376 104.836,65.376 107.836,65.376 110.836,65.376 113.836,65.376 116.836,65.376 31.336,68.376 34.336,68.376 49.336,68.376 52.336,68.376 55.336,68.376 58.336,68.376 61.336,68.376 64.336,68.376 67.336,68.376 76.336,68.376 82.336,68.376 94.336,68.376 97.336,68.376 100.336,68.376 106.336,68.376 109.336,68.376 112.336,68.376 115.336,68.376 26.836,71.376 29.836,71.376 41.836,71.376 50.836,71.376 53.836,71.376 56.836,71.376 59.836,71.376 74.836,71.376 83.836,71.376 92.836,71.376 98.836,71.376 101.836,71.376 104.836,71.376 110.836,71.376 113.836,71.376 116.836,71.376 119.836,71.376 28.336,74.376 40.336,74.376 43.336,74.376 64.336,74.376 67.336,74.376 70.336,74.376 73.336,74.376 76.336,74.376 85.336,74.376 91.336,74.376 97.336,74.376 100.336,74.376 103.336,74.376 109.336,74.376 112.336,74.376 115.336,74.376 118.336,74.376 35.836,77.376 47.836,77.376 50.836,77.376 53.836,77.376 107.836,77.376 110.836,77.376 113.836,77.376 116.836,77.376 119.836,77.376 28.336,80.376 31.336,80.376 52.336,80.376 55.336,80.376 61.336,80.376 82.336,80.376 91.336,80.376 94.336,80.376 97.336,80.376 112.336,80.376 115.336,80.376 118.336,80.376 26.836,83.376 29.836,83.376 32.836,83.376 83.836,83.376 86.836,83.376 89.836,83.376 92.836,83.376 95.836,83.376 98.836,83.376 104.836,83.376 107.836,83.376 110.836,83.376 116.836,83.376 119.836,83.376 28.336,86.376 31.336,86.376 40.336,86.376 43.336,86.376 46.336,86.376 49.336,86.376 52.336,86.376 55.336,86.376 64.336,86.376 70.336,86.376 73.336,86.376 76.336,86.376 79.336,86.376 85.336,86.376 88.336,86.376 94.336,86.376 97.336,86.376 100.336,86.376 106.336,86.376 109.336,86.376 112.336,86.376 118.336,86.376 26.836,89.376 29.836,89.376 47.836,89.376 50.836,89.376 53.836,89.376 65.836,89.376 71.836,89.376 74.836,89.376 77.836,89.376 86.836,89.376 89.836,89.376 92.836,89.376 95.836,89.376 98.836,89.376 110.836,89.376 116.836,89.376 119.836,89.376 28.336,92.376 43.336,92.376 46.336,92.376 49.336,92.376 52.336,92.376 55.336,92.376 67.336,92.376 73.336,92.376 76.336,92.376 88.336,92.376 91.336,92.376 103.336,92.376 112.336,92.376 118.336,92.376 26.836,95.376 29.836,95.376 35.836,95.376 38.836,95.376 41.836,95.376 44.836,95.376 53.836,95.376 56.836,95.376 74.836,95.376 77.836,95.376 80.836,95.376 83.836,95.376 86.836,95.376 89.836,95.376 95.836,95.376 98.836,95.376 110.836,95.376 116.836,95.376 119.836,95.376 28.336,98.376 34.336,98.376 37.336,98.376 40.336,98.376 43.336,98.376 46.336,98.376 52.336,98.376 55.336,98.376 58.336,98.376 61.336,98.376 64.336,98.376 67.336,98.376 70.336,98.376 73.336,98.376 79.336,98.376 82.336,98.376 85.336,98.376 88.336,98.376 97.336,98.376 100.336,98.376 103.336,98.376 106.336,98.376 112.336,98.376 118.336,98.376 26.836,101.376 29.836,101.376 35.836,101.376 38.836,101.376 41.836,101.376 44.836,101.376 47.836,101.376 50.836,101.376 53.836,101.376 56.836,101.376 59.836,101.376 62.836,101.376 65.836,101.376 68.836,101.376 71.836,101.376 74.836,101.376 80.836,101.376 83.836,101.376 86.836,101.376 89.836,101.376 92.836,101.376 95.836,101.376 98.836,101.376 101.836,101.376 104.836,101.376 107.836,101.376 110.836,101.376 116.836,101.376 119.836,101.376 28.336,104.376 34.336,104.376 37.336,104.376 40.336,104.376 43.336,104.376 46.336,104.376 55.336,104.376 58.336,104.376 79.336,104.376 91.336,104.376 94.336,104.376 97.336,104.376 100.336,104.376 103.336,104.376 106.336,104.376 109.336,104.376 112.336,104.376 118.336,104.376 56.836,107.376 92.836,107.376 95.836,107.376 98.836,107.376 101.836,107.376 104.836,107.376 107.836,107.376 110.836,107.376 116.836,107.376 119.836,107.376 28.336,110.376 58.336,110.376 61.336,110.376 64.336,110.376 67.336,110.376 70.336,110.376 79.336,110.376 97.336,110.376 100.336,110.376 103.336,110.376 106.336,110.376 109.336,110.376 112.336,110.376 118.336,110.376 26.836,113.376 29.836,113.376 35.836,113.376 38.836,113.376 44.836,113.376 86.836,113.376 110.836,113.376 116.836,113.376 119.836,113.376 34.336,116.376 58.336,116.376 67.336,116.376 70.336,116.376 91.336,116.376 94.336,116.376 97.336,116.376 100.336,116.376 103.336,116.376 106.336,116.376 109.336,116.376 118.336,116.376 26.836,119.376 62.836,119.376 92.836,119.376 95.836,119.376 98.836,119.376 101.836,119.376 107.836,119.376 110.836,119.376 116.836,119.376 119.836,119.376 37.336,122.376 40.336,122.376 43.336,122.376 55.336,122.376 58.336,122.376 61.336,122.376 64.336,122.376 67.336,122.376 70.336,122.376 73.336,122.376 76.336,122.376 79.336,122.376 103.336,122.376 106.336,122.376 109.336,122.376 118.336,122.376 26.836,125.376 29.836,125.376 32.836,125.376 44.836,125.376 47.836,125.376 50.836,125.376 53.836,125.376 56.836,125.376 59.836,125.376 62.836,125.376 65.836,125.376 68.836,125.376 71.836,125.376 74.836,125.376 77.836,125.376 80.836,125.376 116.836,125.376 119.836,125.376 37.336,128.376 40.336,128.376 43.336,128.376 46.336,128.376 49.336,128.376 52.336,128.376 55.336,128.376 58.336,128.376 61.336,128.376 64.336,128.376 67.336,128.376 70.336,128.376 73.336,128.376 76.336,128.376 79.336,128.376 85.336,128.376 88.336,128.376 118.336,128.376 26.836,131.376 35.836,131.376 38.836,131.376 41.836,131.376 44.836,131.376 47.836,131.376 50.836,131.376 53.836,131.376 56.836,131.376 59.836,131.376 62.836,131.376 65.836,131.376 68.836,131.376 71.836,131.376 74.836,131.376 77.836,131.376 80.836,131.376 83.836,131.376 86.836,131.376 92.836,131.376 95.836,131.376 98.836,131.376 101.836,131.376 104.836,131.376 107.836,131.376 110.836,131.376 113.836,131.376 28.336,134.376 31.336,134.376 34.336,134.376 37.336,134.376 40.336,134.376 43.336,134.376 46.336,134.376 49.336,134.376 52.336,134.376 55.336,134.376 58.336,134.376 61.336,134.376 64.336,134.376 67.336,134.376 70.336,134.376 73.336,134.376 79.336,134.376 82.336,134.376 85.336,134.376 88.336,134.376 94.336,134.376
NetC1_2: C1.2 U1.6 | length 6
  Top Layer w0.5: U1.6 88.813,67.056 C1.2
NetC9_1: C9.1 C14.1 D7.2 D12.3 D16.2 D20.1 Q3.3 Q5.2 R8.2 R10.2 U1.1 U1.2 U4.5 | length 148.7
  Top Layer w0.5: D7.2 33.096,116.95 33.096,93.166 R8.2 34.163,90.36 Q3.3 ; D16.2 78.791,71.071 78.791,69.596 U1.1@79.4,69.596 ; U1.1@79.4,69.393 U1.1@79.4,69.596 ; 79.578,69.215 79.146,69.215 79.146,68.326 U1.2 ; U1.1 U1.1@79.4,69.596
  Top Layer w1: D12.3 40.64,80.255 41.335,80.95 C14.1 ; D20.1 79.821,79.834 83.278,76.378 R10.2
  Top Layer w2.5: U1.1@79.4,69.393 79.578,69.215 ; D20.1 79.4,83.466 81.94,86.006 Q5.2 ; U1.1 D20.1@79.821,79.834
  Bottom Layer w0.5: D7.2 36.288,120.142 40.981,120.142 C9.1 41.326,118.201 41.326,114.452 44.983,110.795 47.828,110.795 U4.5
  Bottom Layer w2.5: Q3.3 35.306,85.335 D12.3 43.523,83.392 76.263,83.392 D20.1
NetC9_2: C9.2 D6.1 D7.1 R2.1 U4.6 | length 39
  Top Layer w0.5: D7.1 37.124,110.618 C9.2
  Bottom Layer w0.5: D6.1 30.607,107.85 R2.1 31.501,107.85 D7.1 38.454,107.85 39.494,106.81 51.308,106.81 52.151,107.653 52.151,108.158 U4.6
NetC11_1: C11.1 C15.1 D9.2 D13.3 D19.2 D21.1 K2.21 K2.22 Q2.3 Q4.2 R9.2 R11.2 U3.5 | length 184.1
  Top Layer w1: D13.3 70.958,80.255 72.07,81.367 C15.1 ; D19.2 95.643,72.365 R11.2 97.951,76.403 D21.1
  Top Layer w2.5: Q2.3@58.832,89.439 58.166,90.106 R9.2 58.166,93.751 60.096,95.682 67.827,95.682 69.291,94.217 69.291,88.163 64.135,83.007 D13.3 62.102,78.222 K2.22 K2.21 ; D21.1 101.803,83.466 104.343,86.006 Q4.2
  Bottom Layer w0.5: R9.2 59.231,91.034 68.301,91.034 81.483,104.216 89.738,104.216 90.576,105.054 90.576,109.931 89.56,110.947 86.766,110.947 85.496,109.677 ; D9.2 70.639,120.142 75.576,120.142 C11.1 77.738,117.98 84.814,117.98 85.496,117.297 85.496,109.677 ; C15.1 74.992,78.486 89.521,78.486 R11.2 ; U3.5 85.496,109.677
NetC11_2: C11.2 D8.1 D9.1 R3.1 U3.6 | length 48.6
  Bottom Layer w0.5: D8.1 64.731,107.85 R3.1 65.621,107.85 D9.1 69.841,108.16 72.408,108.16 73.076,107.493 83.769,107.493 ; C11.2 73.438,117.28 82.796,117.28 82.956,117.119 82.956,108.306 83.769,107.493 ; U3.6 85.852,107.493 83.769,107.493
NetC14_2: C14.2 D10.1 R4.1 | length 29
  Top Layer w1: R4.1 33.601,72.831 35.887,72.831 39.637,76.581 D10.1 46.533,80.95 C14.2
NetC15_2: C15.2 D11.1 R5.1 | length 17.7
  Top Layer w1: D11.1 68.509,76.396 72.082,76.396 C15.2
  Bottom Layer w1: R5.1 57.273,75.111 61.914,75.111 63.409,76.606 D11.1
NetC16_2: C16.2 D16.1 R10.1 | length 18.8
  Top Layer w1: D16.1 89.154,74.322 C16.2
  Bottom Layer w1: R10.1 79.223,76.378 82.906,72.695 D16.1
NetC17_2: C17.2 D19.1 R11.1 | length 7.5
  Top Layer w1: R11.1 C17.2 104.894,76.374 104.894,75.266 D19.1
NetD6_2: D6.2 D8.2 J5.3 U3.3 U4.3 | length 142.5
  Top Layer w0.5: v2(70.612,107.061) 73.457,109.906 78.003,109.906 U3.3 81.356,110.617 96.114,110.617 108.661,123.165 108.661,125.929 J5.3
  Bottom Layer w0.5: D8.2 59.79,119.913 47.574,119.913 41.656,125.832 35.374,125.832 D6.2 35.213,110.749 42.794,110.749 U4.3 46.033,107.51 50.589,107.51 51.486,108.407 51.486,109.118 52.045,109.677 53.34,109.677 53.873,109.144 53.873,107.417 55.372,105.918 69.469,105.918 v2(70.612,107.061)
NetD14_A: D14.A Q3.1 R6.2 | length 7.2
  Top Layer w1: R6.2 37.811,92.099 38.011,92.299 D14.A 40.386,91.283 Q3.1
NetD14_C: D14.C R6.1 R8.1 U4.7 | length 27
  Top Layer w1: R8.1 34.201,103.061 41.24,103.061 D14.C 49.432,102.899 U4.7
  Bottom Layer w0.5: R8.1 R6.1
NetD15_A: D15.A Q2.1 R7.2 | length 7.4
  Top Layer w1: R7.2 61.814,92.099 62.039,92.324 D15.A 64.135,91.054 Q2.1
NetD15_C: D15.C R7.1 R9.1 U3.7 | length 37.3
  Top Layer w1: R9.1 58.204,103.061 65.268,103.061 D15.C
  Bottom Layer w0.5: R9.1 R7.1
  Bottom Layer w1: D15.C 70.336,102.924 73.369,105.958 86.857,105.958 U3.7
NetD17_A: D17.A Q5.1 R12.2 | length 7.4
  Top Layer w1: R12.2 82.182,92.061 82.446,92.324 D17.A 85.776,92.148 84.903,91.275 84.903,89.639 Q5.1
NetD17_C: D17.C R12.1 R14.1 U4.1 | length 49.3
  Top Layer w1: U4.1 41.203,109.91 56.511,109.91 61.29,105.131 76.48,105.131 R14.1 78.55,103.061 R12.1 85.639,103.061 D17.C
NetD18_A: D18.A Q4.1 R13.2 | length 7.3
  Top Layer w1: R13.2 104.638,92.099 104.838,92.299 D18.A 108.179,92.148 107.306,91.275 107.306,89.639 Q4.1
NetD18_C: D18.C R13.1 R15.1 U3.1 | length 39.8
  Top Layer w1: U3.1 76.048,106.782 85.039,106.782 88.722,103.099 R15.1 101.121,103.099 101.321,102.899 104.584,102.899 D18.C
  Bottom Layer w0.5: R15.1 R13.1
NetD33_2: D33.2 K2.A2 Q11.1 R52.2 | length 32.2
  Top Layer w1: Q11.1 38.699,71.131 ; K2.A2 43.619,72 D33.2 39.129,71.131 38.699,71.131 ; R52.2 52.084,63.588 46.863,68.809 41.021,68.809 38.699,71.131
NetD35_1: D35.1 D36.2 J3.1 J3.2 K2.14 | length 50.1
  Top Layer w2.5: J3.2@33.376,50.307 J3.1 35.972,56.972 47.65,56.972 50.14,54.483 D35.1 D36.2 59.85,59.342 67.024,59.342 K2.14
NetD35_2: D35.2 D37.2 U8.2 | length 164.5
  Bottom Layer w0.5: D35.2 D37.2 43.2,45.644 32.258,45.644 25.629,52.273 25.629,119.736 35.331,129.438 88.404,129.438 U8.2
NetD36_1: D36.1 D38.1 R47.1 | length 219.2
  Top Layer w0.5: v2(121.209,135.28) 121.615,134.874 v2(121.615,41.351)
  Bottom Layer w0.5: D38.1 43.945,40.742 51.609,40.742 D36.1 54.297,43.434 110.287,43.434 112.37,41.351 v2(121.615,41.351) ; R47.1 81.811,136.271 95.885,136.271 96.876,135.28 v2(121.209,135.28)
NetD37_1: D37.1 D38.2 J3.3 J3.4 K2.24 | length 62.7
  Top Layer w2.5: 33.376,42.842 J3.4 J3.3 33.607,47.607 35.077,47.607 D38.2 ; D38.2@41.597,53.789 D37.1
  Bottom Layer w0.5: D38.2 D37.1
  Bottom Layer w2.5: D37.1 47.66,51.544 57.616,51.544 69.567,63.495 69.567,65.314 72.182,67.929 K2.24
NetDS2_2: DS2.2 R31.1 | length 6.9
  Bottom Layer w0.5: R31.1 102.171,69.762 DS2.2
NetDS8_2: DS8.2 R52.1 | length 3.5
  Top Layer w1: DS8.2 38.642,61.951 41.029,59.563 R52.1
NetJ1_1: J1.1 R46.1 U8.4 | length 28
  Top Layer w0.5: R46.1 77.089,133.489 U8.4
  Bottom Layer w0.5: U8.4 84.314,126.263 98.771,126.263 J1.1
NetJ1_2: J1.2 R42.2 R44.2 | length 151.5
  Top Layer w1: R44.2 R42.2
  Bottom Layer w0.5: R42.2 33.757,84.48 33.604,84.633 33.604,89.941 34.62,90.957 44.094,90.957 47.396,87.655 68.326,87.655 71.349,90.678 93.421,90.678 96.291,93.548 105.385,93.548 114.021,102.184 114.021,128.626 113.081,129.565 102.794,129.565 101.854,128.626 101.854,126.806 J1.2
NetJ1_3: J1.3 U1.7 | length 100
  Top Layer w0.5: U1.7 v2(87.071,68.326)
  Bottom Layer w0.5: v2(87.071,68.326) 97.561,78.816 108.306,78.816 114.732,85.242 114.732,129.337 113.614,130.454 100.422,130.454 J1.3
NetJ4_1: J4.1 U3.12 U4.10 | length 65.7
  Top Layer w1: U4.10 50.106,116.205 52.138,114.173 77.225,114.173 79.257,116.205 U3.12 79.324,119.426 85.671,125.773 90.06,125.773 93.268,128.98 104.62,128.98 106.093,127.508 J4.1
NetJ4_3: J4.3 U3.10 U4.12 | length 67
  Top Layer w1: U4.12 45.026,116.205 48.683,112.547 80.679,112.547 84.337,116.205 U3.10 88.816,120.617 97.747,120.617 102.111,124.98 102.111,125.883 103.7,127.473 J4.3
NetK2_11: K2.11 U1.3 U1.4 | length 18.2
  Top Layer w0.5: U1.3 79.821,67.121 79.014,66.314 79.542,65.786 U1.4 80.467,65.786 80.467,66.243
  Top Layer w2.5: K2.11 69.842,67.2 74.651,67.2 75.608,66.243 80.467,66.243
NetQ11_2: Q11.2 R42.1 | length 6.9
  Top Layer w1: R42.1 33.772,63.146 33.772,65.339 Q11.2
NetR47_2: R47.2 U8.1 | length 7.4
  Top Layer w0.5: U8.1 91.541,130.036 R47.2
pads on no net: 1.1 ?.1@30.226,130.429 ?.1@100.482,47.168 ?.1@117.348,131.445 J1.4 K2.12 U3.4 U3.8 U3.14 U4.4 U4.8 U4.14

## Polygon pours and split planes (outlines as drawn)
GND on Bottom Layer "GND_L02_P001" (solid, remove dead copper, pour order 1): 24.765,40.227 24.765,135.227 cw(c26.765,135.227) 26.765,137.227 121.765,137.227 cw(c121.765,135.227) 123.765,135.227 123.765,40.227 cw(c121.765,40.227) 121.765,38.227 26.765,38.227 cw(c26.765,40.227)
GND on Top Layer "GND_L01_P000" (solid, remove dead copper, pour order 0): 24.765,40.227 24.765,135.227 cw(c26.765,135.227) 26.765,137.227 121.765,137.227 cw(c121.765,135.227) 123.765,135.227 123.765,40.227 cw(c121.765,40.227) 121.765,38.227 26.765,38.227 cw(c26.765,40.227)

## Keep-outs
Keep-Out Layer:
  the board outline again, w0.18

## Silkscreen, mask and mechanical layers (free items; w line width, h text height)
Top Overlay:
  lines w0.18: 112.199,71.958 ccw(c112.453,71.958) 112.453,71.704 121.945,71.704 ccw(c121.945,71.958) 122.199,71.958 122.199,101.45 ccw(c121.945,101.45) 121.945,101.704 112.453,101.704 ccw(c112.453,101.45) 112.199,101.45 112.199,71.958 ; 112.199,103.088 ccw(c112.453,103.088) 112.453,102.834 121.945,102.834 ccw(c121.945,103.088) 122.199,103.088 122.199,122.58 ccw(c121.945,122.58) 121.945,122.834 112.453,122.834 ccw(c112.453,122.58) 112.199,122.58 112.199,103.088
  text "+24 V" at 113.563,61.214 h1
  text "PHASE" at 25.603,57.328 h1
  text "GND" at 114.681,39.903 h1
  text "NEUTRAL" at 25.679,39.675 h1
Bottom Overlay:
  drawing of 68 lines, arcs and shapes, not listed
  text "INV POS IN" at 106.096,133.96 h1
  text "INV NEG IN" at 104.673,131.928 h1
  text "+5" at 114.173,131.851 h1
  text "DRVR VCC" at 113.995,129.743 h1
  text "NC" at 97.892,121.793 h1 r270
  text "ALT CS" at 93.98,121.158 h1 r270
  text "GND" at 104.145,120.904 h1 r270
  text "GND" at 110.642,120.777 h1 r270
  text "+24V" at 113.309,119.253 h1 r270
  text "+3.3V" at 106.68,119.126 h1 r270
  text "Mains ZC" at 91.059,118.262 h1 r270
  text "Mains Relay" at 100.663,113.386 h1 r270
  text "Projeto Final de Curso" at 97.638,57.102 h1
  text "Engenharia Eletrotecnica e de Computadores" at 97.638,54.737 h1
  text "2024" at 64.11,52.706 h1
  text "Conversor Bi-Direcional - Inversor" at 97.638,52.706 h1
  text "Projeto de: Guilherme Candido" at 97.638,50.341 h1
  text "Orientado Por:" at 97.638,48.309 h1
  text "Doutor Luis Neves" at 97.638,46.278 h1
  text "Doutora Natalia Gameiro" at 97.638,44.246 h1
  text "Doutor Nuno Gil" at 97.638,42.215 h1